# EAGLE board Panelized-CC2-BufferPack-V1R0-21-May-2019 (EAGLE 5.10)
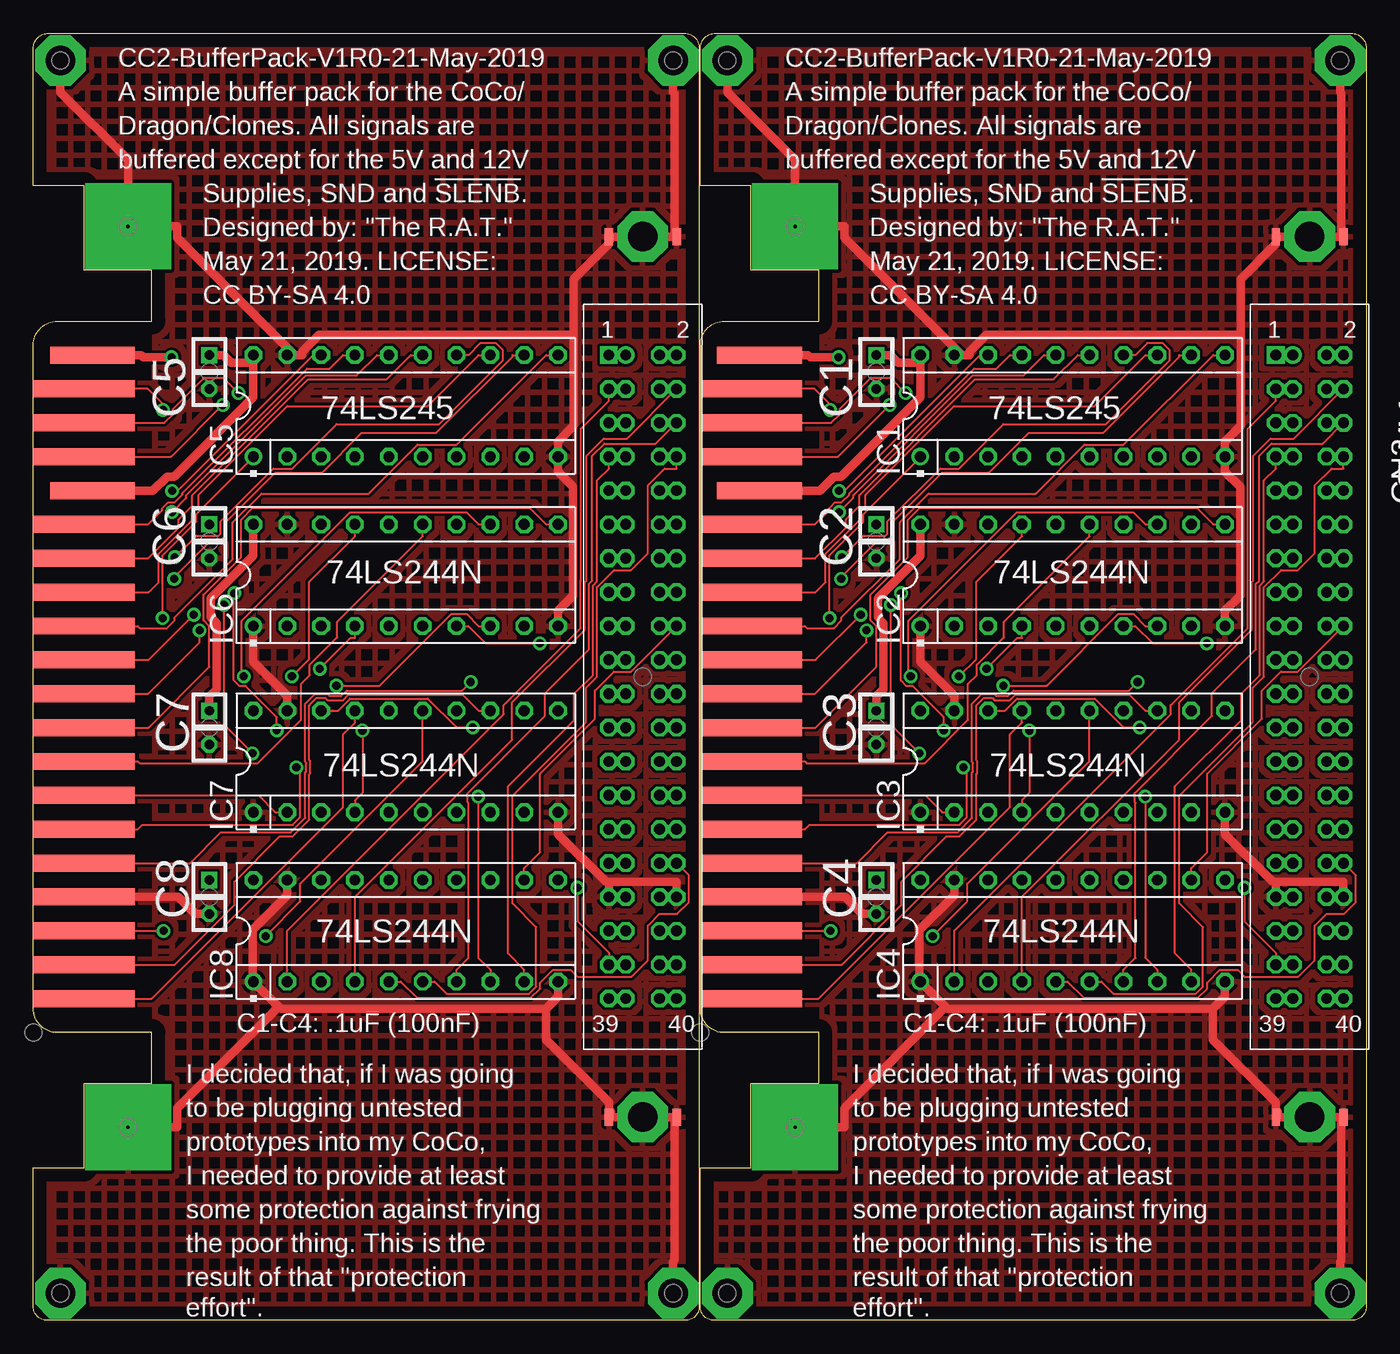
[diagram p0: board, top side]
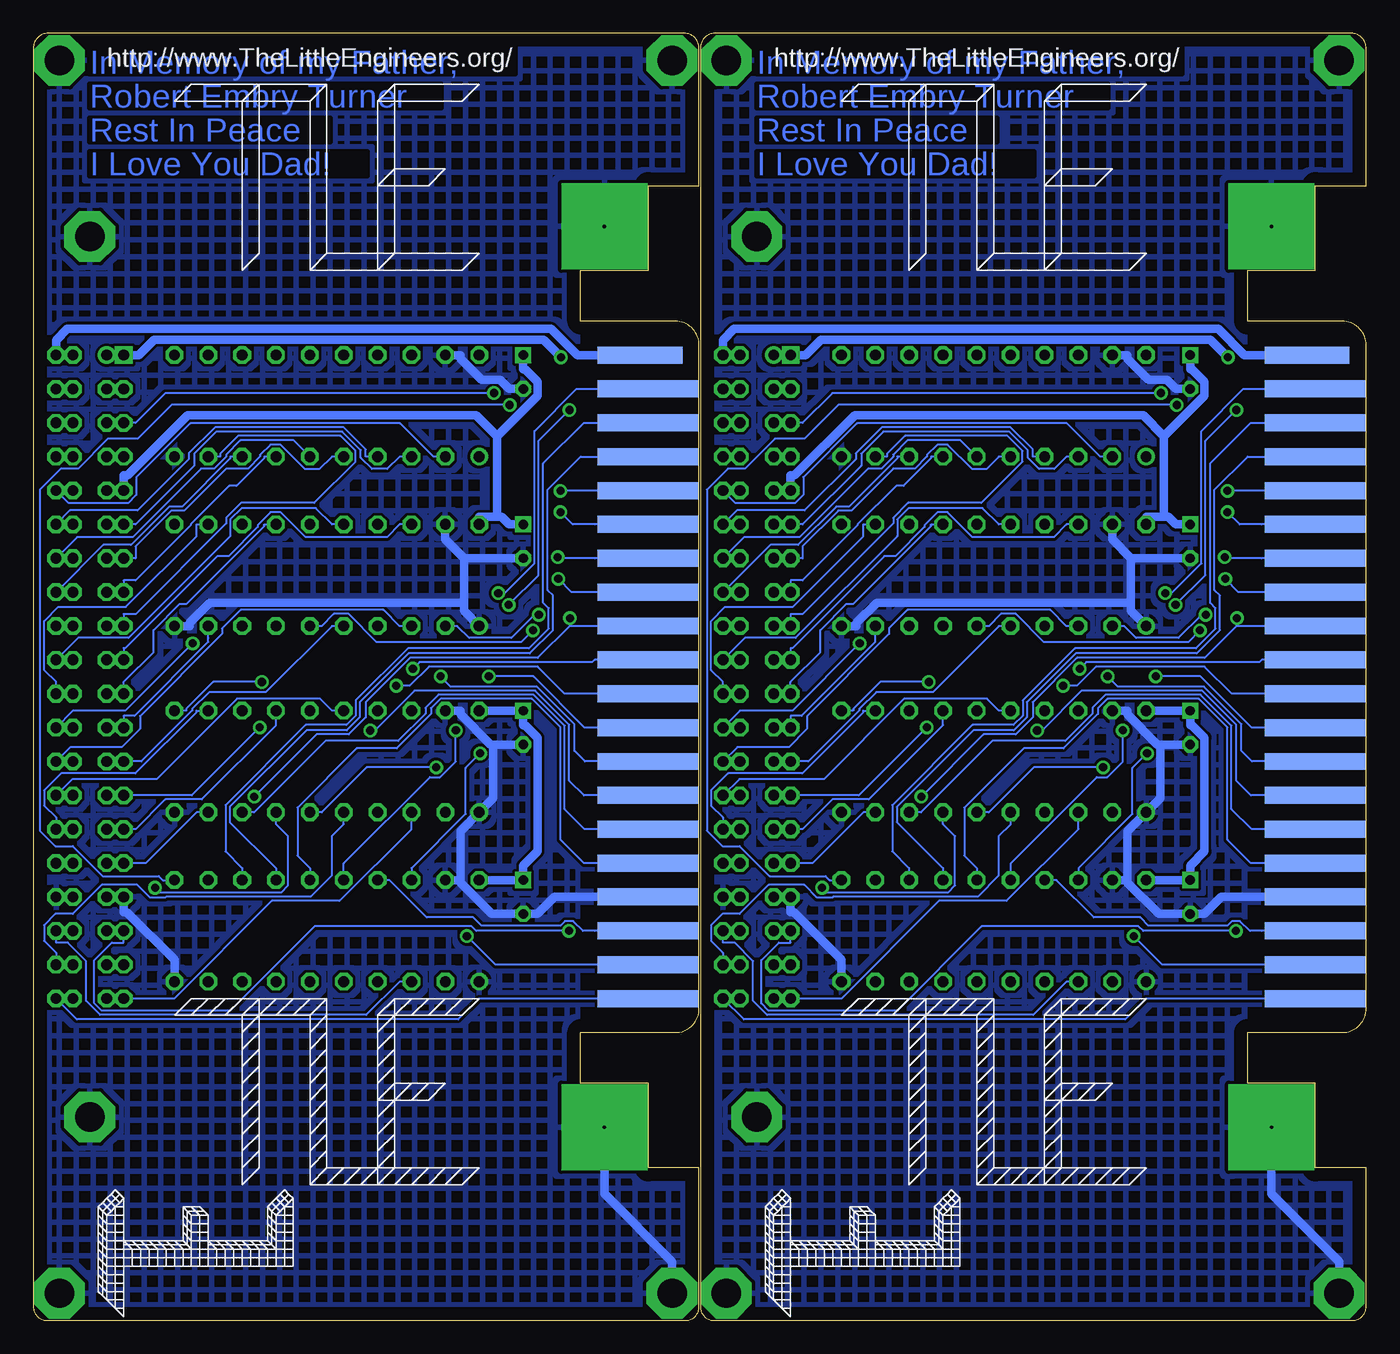
[diagram p1: board, bottom side, seen from below]

Size 100 x 96.52 mm. Coordinates in mm from the lower left corner, seen from the top.
Outline: 58.93,21.59 51.83,21.59 arc-90 50.04,23.39 50.04,73.13 arc-90 51.83,74.93 58.93,74.93 58.93,78.74 53.85,78.74 53.85,85.09 50.04,85.09 50.04,95.39 arc-90 51.16,96.52 98.91,96.52 arc-90 100,95.43 100,1 arc-90 99,0 51.04,0 arc-90 50.04,1 50.04,11.43 53.85,11.43 53.85,17.78 58.93,17.78 58.93,21.59
Outline: 8.89,21.59 1.8,21.59 arc-90 0,23.39 0,73.13 arc-90 1.8,74.93 8.89,74.93 8.89,78.74 3.81,78.74 3.81,85.09 0,85.09 0,95.39 arc-90 1.13,96.52 48.87,96.52 arc-90 49.96,95.43 49.96,1 arc-90 48.96,0 1,0 arc-90 0,1 0,11.43 3.81,11.43 3.81,17.78 8.89,17.78 8.89,21.59
Copper layers (1*16): Top 0.035mm / dielectric 1.5mm / Bottom 0.035mm
Design rules "default": minimum track width 10mil, minimum drill 24mil, track to track 8mil, track to pad 8mil, pad to pad 8mil, via to via 8mil, smd to smd 8mil, copper to edge 40mil, drill to drill 8mil, minimum pad ring 10mil, minimum via ring 8mil, stop-mask expansion 4mil, vias tented up to drill 0mil, thermal gap 10mil
Net classes: 0 default: width 0.152 mm, clearance 0.152 mm; 1 power: width 0.635 mm, clearance 0.152 mm

## Footprints (pad centres in the part's own frame; a part is rotated, then mirrored left to right if it is on the bottom)
PTH1 = drill 0.7 square: + -1.27,0 | drill 0.7 octagon: - 1.27,0
EDGE-CARD-PLUG-2X20-100-MEDIUM = smd 6.35 x 1.27: 1 4.445,50.8; 9 4.445,40.64 | smd 6.35 x 1.27 bottom: 2 4.445,50.8 | smd 7.62 x 1.27: 3 3.81,48.26; 5 3.81,45.72; 7 3.81,43.18; 11 3.81,38.1; 13 3.81,35.56; 15 3.81,33.02; 17 3.81,30.48; 19 3.81,27.94; 21 3.81,25.4; 23 3.81,22.86; 25 3.81,20.32; 27 3.81,17.78; 29 3.81,15.24; 31 3.81,12.7; 33 3.81,10.16; 35 3.81,7.62; 37 3.81,5.08; 39 3.81,2.54 | smd 7.62 x 1.27 bottom: 4 3.81,48.26; 6 3.81,45.72; 8 3.81,43.18; 10 3.81,40.64; 12 3.81,38.1; 14 3.81,35.56; 16 3.81,33.02; 18 3.81,30.48; 20 3.81,27.94; 22 3.81,25.4; 24 3.81,22.86; 26 3.81,20.32; 28 3.81,17.78; 30 3.81,15.24; 32 3.81,12.7; 34 3.81,10.16; 36 3.81,7.62; 38 3.81,5.08; 40 3.81,2.54
HEADER/EDGE-CARD-RECEPTACLE-2X20-100-STRAIGHT-W/EARS = drill 0.813 square: 1 -24.13,-2.54 | drill 0.813 octagon: 2 -24.13,2.54; 3 -21.59,-2.54; 4 -21.59,2.54; 5 -19.05,-2.54; 6 -19.05,2.54; 7 -16.51,-2.54; 8 -16.51,2.54; 9 -13.97,-2.54; 10 -13.97,2.54; 11 -11.43,-2.54; 12 -11.43,2.54; 13 -8.89,-2.54; 14 -8.89,2.54; 15 -6.35,-2.54; 16 -6.35,2.54; 17 -3.81,-2.54; 18 -3.81,2.54; 19 -1.27,-2.54; 20 -1.27,2.54; 21 1.27,-2.54; 22 1.27,2.54; 23 3.81,-2.54; 24 3.81,2.54; 25 6.35,-2.54; 26 6.35,2.54; 27 8.89,-2.54; 28 8.89,2.54; 29 11.43,-2.54; 30 11.43,2.54; 31 13.97,-2.54; 32 13.97,2.54; 33 16.51,-2.54; 34 16.51,2.54; 35 19.05,-2.54; 36 19.05,2.54; 37 21.59,-2.54; 38 21.59,2.54; 39 24.13,-2.54; 40 24.13,2.54; 42 -24.13,1.27; 43 -21.59,-1.27; 44 -21.59,1.27; 45 -19.05,-1.27; 46 -19.05,1.27; 47 -16.51,-1.27; 48 -16.51,1.27; 49 -13.97,-1.27; 50 -13.97,1.27; 51 -11.43,-1.27; 52 -11.43,1.27; 53 -8.89,-1.27; 54 -8.89,1.27; 55 -6.35,-1.27; 56 -6.35,1.27; 57 -3.81,-1.27; 58 -3.81,1.27; 59 -1.27,-1.27; 60 -1.27,1.27; 61 1.27,-1.27; 62 1.27,1.27; 63 3.81,-1.27; 64 3.81,1.27; 65 6.35,-1.27; 66 6.35,1.27; 67 8.89,-1.27; 68 8.89,1.27; 69 11.43,-1.27; 70 11.43,1.27; 71 13.97,-1.27; 72 13.97,1.27; 73 16.51,-1.27; 74 16.51,1.27; 75 19.05,-1.27; 76 19.05,1.27; 77 21.59,-1.27; 78 21.59,1.27; 79 24.13,-1.27; 80 24.13,1.27 | drill 0.813 round: 41 -24.13,-1.27 | drill 2.2 pad 3.81 octagon: 81 -33.02,0; 84 33.02,0 | smd 1.27 x 0.635: 82 -33.02,2.54; 83 -33.02,-2.54; 85 33.02,2.54; 86 33.02,-2.54
SQUARE = drill 0.254 pad 6.452 square: GND 0,0
STAND-OFF = drill 2.2 pad 3.81 octagon: GND 0,0
DIL20-3-TOP = drill 0.813 round: 1 -11.43,-3.81 | drill 0.813 octagon: 2 -8.89,-3.81; 3 -6.35,-3.81; 4 -3.81,-3.81; 5 -1.27,-3.81; 6 1.27,-3.81; 7 3.81,-3.81; 8 6.35,-3.81; 9 8.89,-3.81; 10 11.43,-3.81; 11 11.43,3.81; 12 8.89,3.81; 13 6.35,3.81; 14 3.81,3.81; 15 1.27,3.81; 16 -1.27,3.81; 17 -3.81,3.81; 18 -6.35,3.81; 19 -8.89,3.81; 20 -11.43,3.81

## Placement (x,y rotation side)
C1  [PTH1]  63.25,71.12 270 top
C2  [PTH1]  63.25,58.42 270 top
C3  [PTH1]  63.25,44.45 270 top
C4  [PTH1]  63.25,31.75 270 top
C5  [PTH1]  13.21,71.12 270 top
C6  [PTH1]  13.21,58.42 270 top
C7  [PTH1]  13.21,44.45 270 top
C8  [PTH1]  13.21,31.75 270 top
CN1  [EDGE-CARD-PLUG-2X20-100-MEDIUM]  50.04,21.59 0 top
CN2  [HEADER/EDGE-CARD-RECEPTACLE-2X20-100-STRAIGHT-W/EARS]  95.76,48.26 270 top
CN3  [EDGE-CARD-PLUG-2X20-100-MEDIUM]  0,21.59 0 top
CN4  [HEADER/EDGE-CARD-RECEPTACLE-2X20-100-STRAIGHT-W/EARS]  45.72,48.26 270 top
GND1  GROUNDING-SQUARE  [SQUARE]  57.15,82.04 0 top
GND2  GROUNDING-SQUARE  [SQUARE]  57.15,14.48 0 top
GND3  GROUNDING-STAND-OFF  [STAND-OFF]  52.07,94.49 0 top
GND4  GROUNDING-STAND-OFF  [STAND-OFF]  98.04,94.49 0 top
GND5  GROUNDING-STAND-OFF  [STAND-OFF]  98.04,2.03 0 top
GND6  GROUNDING-STAND-OFF  [STAND-OFF]  52.07,2.03 0 top
GND7  GROUNDING-SQUARE  [SQUARE]  7.11,82.04 0 top
GND8  GROUNDING-SQUARE  [SQUARE]  7.11,14.48 0 top
GND9  GROUNDING-STAND-OFF  [STAND-OFF]  2.03,94.49 0 top
GND10  GROUNDING-STAND-OFF  [STAND-OFF]  48.01,94.49 0 top
GND11  GROUNDING-STAND-OFF  [STAND-OFF]  48.01,2.03 0 top
GND12  GROUNDING-STAND-OFF  [STAND-OFF]  2.03,2.03 0 top
IC1  [DIL20-3-TOP]  77.98,68.58 0 top
IC2  74LS244N  [DIL20-3-TOP]  77.98,55.88 0 top
IC3  74LS244N  [DIL20-3-TOP]  77.98,41.91 0 top
IC4  74LS244N  [DIL20-3-TOP]  77.98,29.21 0 top
IC5  [DIL20-3-TOP]  27.94,68.58 0 top
IC6  74LS244N  [DIL20-3-TOP]  27.94,55.88 0 top
IC7  74LS244N  [DIL20-3-TOP]  27.94,41.91 0 top
IC8  74LS244N  [DIL20-3-TOP]  27.94,29.21 0 top
U$1  [TLE-LOGO-3]  79.25,83.82 0 bottom
U$2  [TLE-LOGO-4]  84.33,10.16 0 bottom
U$3  [TLE-LOGO-10]  80.52,0.25 90 bottom
U$4  [TLE-LOGO-3]  29.21,83.82 0 bottom
U$5  [TLE-LOGO-4]  34.29,10.16 0 bottom
U$6  [TLE-LOGO-10]  30.48,0.25 90 bottom

## Library data of the parts
C1-C8 CN1-CN4 GND1-GND12 IC1-IC8 = CC2-BufferPack-V1R0-21-May-2019
U$1-U$6 = TLE_LOGOS

## Nets
!BCART: CN2.8 IC4.6
!BCART1: CN4.8 IC8.6
!BCTS: CN2.32 IC4.5
!BCTS1: CN4.32 IC8.5
!BHALT: CN2.3 IC4.2
!BHALT1: CN4.3 IC8.2
!BNMI: CN2.4 IC4.4
!BNMI1: CN4.4 IC8.4
!BSCS: CN2.36 IC4.3
!BSCS1: CN4.36 IC8.3
!CART: CN1.8 IC4.14
!CART1: CN3.8 IC8.14
!CTS: CN1.32 IC4.15
!CTS1: CN3.32 IC8.15
!HALT: CN1.3 IC4.18
!HALT1: CN3.3 IC8.18
!NMI: CN1.4 IC4.16
!NMI1: CN3.4 IC8.16
!RESET: CN1.5 CN2.5
!RESET1: CN3.5 CN4.5
!SCS: CN1.36 IC4.17
!SCS1: CN3.36 IC8.17
!SLENB: CN1.40 CN2.40
!SLENB1: CN3.40 CN4.40
+12V [power]: CN1.2 CN2.2
+12V1 [power]: CN3.2 CN4.2
-12V [power]: CN1.1 CN2.1
-12V1 [power]: CN3.1 CN4.1
A0: CN1.19 IC2.2
A1: CN1.20 IC2.4
A2: CN1.21 IC2.6
A3: CN1.22 IC2.8
A4: CN1.23 IC2.11
A5: CN1.24 IC2.13
A6: CN1.25 IC2.15
A7: CN1.26 IC2.17
A8: CN1.27 IC3.2
A9: CN1.28 IC3.4
A10: CN1.29 IC3.6
A11: CN1.30 IC3.8
A12: CN1.31 IC3.11
A13: CN1.37 IC3.13
A14: CN1.38 IC3.15
A15: CN1.39 IC3.17
A16: CN3.19 IC6.2
A17: CN3.20 IC6.4
A18: CN3.21 IC6.6
A19: CN3.22 IC6.8
A20: CN3.23 IC6.11
A21: CN3.24 IC6.13
A22: CN3.25 IC6.15
A23: CN3.26 IC6.17
A24: CN3.27 IC7.2
A25: CN3.28 IC7.4
A26: CN3.29 IC7.6
A27: CN3.30 IC7.8
A28: CN3.31 IC7.11
A29: CN3.37 IC7.13
A30: CN3.38 IC7.15
A31: CN3.39 IC7.17
BA0: CN2.19 IC2.18
BA1: CN2.20 IC2.16
BA2: CN2.21 IC2.14
BA3: CN2.22 IC2.12
BA4: CN2.23 IC2.9
BA5: CN2.24 IC2.7
BA6: CN2.25 IC2.5
BA7: CN2.26 IC2.3
BA8: CN2.27 IC3.18
BA9: CN2.28 IC3.16
BA10: CN2.29 IC3.14
BA11: CN2.30 IC3.12
BA12: CN2.31 IC3.9
BA13: CN2.37 IC3.7
BA14: CN2.38 IC3.5
BA15: CN2.39 IC3.3
BA16: CN4.19 IC6.18
BA17: CN4.20 IC6.16
BA18: CN4.21 IC6.14
BA19: CN4.22 IC6.12
BA20: CN4.23 IC6.9
BA21: CN4.24 IC6.7
BA22: CN4.25 IC6.5
BA23: CN4.26 IC6.3
BA24: CN4.27 IC7.18
BA25: CN4.28 IC7.16
BA26: CN4.29 IC7.14
BA27: CN4.30 IC7.12
BA28: CN4.31 IC7.9
BA29: CN4.37 IC7.7
BA30: CN4.38 IC7.5
BA31: CN4.39 IC7.3
BD0: CN2.10 IC1.2
BD1: CN2.11 IC1.3
BD2: CN2.12 IC1.4
BD3: CN2.13 IC1.5
BD4: CN2.14 IC1.6
BD5: CN2.15 IC1.7
BD6: CN2.16 IC1.8
BD7: CN2.17 IC1.9
BD8: CN4.10 IC5.2
BD9: CN4.11 IC5.3
BD10: CN4.12 IC5.4
BD11: CN4.13 IC5.5
BD12: CN4.14 IC5.6
BD13: CN4.15 IC5.7
BD14: CN4.16 IC5.8
BD15: CN4.17 IC5.9
BE: CN2.6 IC4.7
BE1: CN4.6 IC8.7
BQ: CN2.7 IC4.9
BQ1: CN4.7 IC8.9
BR/!W: CN2.18 IC4.12
BR/!W1: CN4.18 IC8.12
D0: CN1.10 IC1.18
D1: CN1.11 IC1.17
D2: CN1.12 IC1.16
D3: CN1.13 IC1.15
D4: CN1.14 IC1.14
D5: CN1.15 IC1.13
D6: CN1.16 IC1.12
D7: CN1.17 IC1.11
D8: CN3.10 IC5.18
D9: CN3.11 IC5.17
D10: CN3.12 IC5.16
D11: CN3.13 IC5.15
D12: CN3.14 IC5.14
D13: CN3.15 IC5.13
D14: CN3.16 IC5.12
D15: CN3.17 IC5.11
E: CN1.6 IC4.13
E1: CN3.6 IC8.13
GND [power]: C1.- C2.- C3.- C4.- CN1.33 CN1.34 CN2.33 CN2.34 CN2.81 CN2.82 CN2.83 CN2.84 CN2.85 CN2.86 GND1.GND GND2.GND GND3.GND GND4.GND GND5.GND GND6.GND IC1.10 IC1.19 IC2.1 IC2.10 IC2.19 IC3.1 IC3.10 IC3.19 IC4.1 IC4.10 IC4.19
GND1 [power]: C5.- C6.- C7.- C8.- CN3.33 CN3.34 CN4.33 CN4.34 CN4.81 CN4.82 CN4.83 CN4.84 CN4.85 CN4.86 GND7.GND GND8.GND GND9.GND GND10.GND GND11.GND GND12.GND IC5.10 IC5.19 IC6.1 IC6.10 IC6.19 IC7.1 IC7.10 IC7.19 IC8.1 IC8.10 IC8.19
Q: CN1.7 IC4.11
Q1: CN3.7 IC8.11
R/!W: CN1.18 IC1.1 IC4.8
R/!W1: CN3.18 IC5.1 IC8.8
SND: CN1.35 CN2.35
SND1: CN3.35 CN4.35
VCC [power]: C1.+ C2.+ C3.+ C4.+ CN1.9 CN2.9 IC1.20 IC2.20 IC3.20 IC4.20
VCC1 [power]: C5.+ C6.+ C7.+ C8.+ CN3.9 CN4.9 IC5.20 IC6.20 IC7.20 IC8.20

## Tracks (layer width: path | path; a pad name or v marks a point on that pad's centre or on a via)
!BCART
  Top 0.152: CN2.8 98.3,63.88 97.41,63.88 96.14,62.61 96.14,57.53 94.87,56.26 93.61,56.26 92.33,54.98 92.33,48.26 91.49,47.42 91.49,44.86 85.98,39.35 85.98,31.27 87.76,29.49 87.76,25.03 87.23,24.51 81.03,24.51 80.14,25.4 IC4.6
!BCART1
  Top 0.152: CN4.8 48.26,63.88 47.37,63.88 46.1,62.61 46.1,57.53 44.83,56.26 43.57,56.26 42.29,54.98 42.29,48.26 41.45,47.42 41.45,44.86 35.94,39.35 35.94,31.27 37.72,29.49 37.72,25.03 37.19,24.51 30.99,24.51 30.1,25.4 IC8.6
!BCTS
  Top 0.152: CN2.32 99.22,33.36 99.22,31.37 98.34,30.48 97.03,30.48 96.14,29.59 96.14,27.02 94.9,25.78 90.86,25.78 90.35,26.29 89.03,26.29 88.06,25.32 88.06,24.88 87.36,24.18 78.82,24.18 77.6,25.4 IC4.5
!BCTS1
  Top 0.152: CN4.32 49.19,33.36 49.19,31.37 48.3,30.48 46.99,30.48 46.1,29.59 46.1,27.02 44.87,25.78 40.82,25.78 40.31,26.29 38.99,26.29 38.03,25.32 38.03,24.88 37.32,24.18 28.78,24.18 27.56,25.4 IC8.5
!BHALT
  Top 0.152: CN2.3 93.22,68.96 91.13,66.87 91.13,55.5 91.11,55.48 91.11,51.91 85.33,46.13 85.33,45.46 69.09,29.22 69.09,26.29 IC4.2
!BHALT1
  Top 0.152: CN4.3 43.18,68.96 41.09,66.87 41.09,55.5 41.07,55.48 41.07,51.91 35.29,46.13 35.29,45.46 19.05,29.22 19.05,26.29 IC8.2
!BNMI
  Top 0.152: CN2.4 94.58,66.13 92.82,66.13 91.53,64.83 91.53,55.47 91.41,55.36 91.41,51.79 85.96,46.33 85.96,43.56 74.17,31.76 74.17,26.29 IC4.4
!BNMI1
  Top 0.152: CN4.4 44.54,66.13 42.78,66.13 41.49,64.83 41.49,55.47 41.38,55.36 41.38,51.79 35.93,46.33 35.93,43.56 24.13,31.76 24.13,26.29 IC8.4
!BSCS
  Bottom 0.152: CN2.36 98.3,28.32 97.41,28.32 96.03,26.94 96.03,23.95 94.98,22.9 75.02,22.9 72.52,25.4 IC4.3
!BSCS1
  Bottom 0.152: CN4.36 48.26,28.32 47.37,28.32 45.99,26.94 45.99,23.95 44.94,22.9 24.98,22.9 22.48,25.4 IC8.3
!CART
  Bottom 0.152: CN1.8 58.93,64.77 61.41,62.29 61.41,54.76 61.02,54.37 61.02,51.77 62.76,50.03 71.83,50.03 75.5,46.36 75.5,45.23 76.48,44.25 79.51,44.25 85.25,38.51 85.25,37.37 81.79,33.91 IC4.14
!CART1
  Bottom 0.152: CN3.8 8.9,64.77 11.38,62.29 11.38,54.76 10.98,54.37 10.98,51.77 12.72,50.03 21.79,50.03 25.46,46.36 25.46,45.23 26.45,44.25 29.47,44.25 35.21,38.51 35.21,37.37 31.75,33.91 IC8.14
!CTS
  Bottom 0.152: CN1.32 58.69,34.29 60.45,36.05 60.45,44.47 62.59,46.61 69.45,46.61 70.16,45.91 70.16,45.47 72.74,42.89 75.73,42.89 80.18,38.45 80.18,34.84 79.25,33.91 IC4.15
!CTS1
  Bottom 0.152: CN3.32 8.65,34.29 10.41,36.05 10.41,44.47 12.56,46.61 19.41,46.61 20.12,45.91 20.12,45.47 22.7,42.89 25.7,42.89 30.14,38.45 30.14,34.84 29.21,33.91 IC8.15
!HALT  (via drill 0.61 pad 1.02)
  Top 0.152: v66.48,42.52 64.34,44.66 v64.34,53.65 | v59.78,68.27 59.78,68.69 58.62,69.85 CN1.3
  Bottom 0.152: v59.78,68.27 62.1,65.95 62.1,55.89 v64.34,53.65 | IC4.18 71.63,33.91 67.56,37.97 67.56,41.43 v66.48,42.52
!HALT1  (via drill 0.61 pad 1.02)
  Top 0.152: v16.44,42.52 14.3,44.66 v14.3,53.65 | v9.74,68.27 9.74,68.69 8.58,69.85 CN3.3
  Bottom 0.152: v9.74,68.27 12.06,65.95 12.06,55.89 v14.3,53.65 | IC8.18 21.59,33.91 17.53,37.97 17.53,41.43 v16.44,42.52
!NMI  (via drill 0.61 pad 1.02)
  Top 0.152: v68.3,44.24 68.3,45.24 65.99,47.56 65.52,47.56 65.08,47.99 65.08,54.5 v65.11,54.53
  Bottom 0.152: CN1.4 59.24,69.85 62.4,66.68 62.4,56.77 64.64,54.53 v65.11,54.53 | v68.3,44.24 68.3,41.9 69.47,40.74 70.25,40.74 76.71,34.28 IC4.16
!NMI1  (via drill 0.61 pad 1.02)
  Top 0.152: v18.26,44.24 18.26,45.24 15.95,47.56 15.48,47.56 15.04,47.99 15.04,54.5 v15.07,54.53
  Bottom 0.152: CN3.4 9.2,69.85 12.37,66.68 12.37,56.77 14.6,54.53 v15.07,54.53 | v18.26,44.24 18.26,41.9 19.43,40.74 20.21,40.74 26.67,34.28 IC8.16
!RESET  (via drill 0.61 pad 1.02)
  Top 0.152: CN1.5 59.86,67.31 60.51,67.96 60.51,68.35 62.86,70.7 64.29,70.7 v65.44,69.55
  Bottom 0.152: v65.44,69.55 90.09,69.55 92.33,67.31 CN2.5
!RESET1  (via drill 0.61 pad 1.02)
  Top 0.152: CN3.5 9.82,67.31 10.48,67.96 10.48,68.35 12.82,70.7 14.25,70.7 v15.4,69.55
  Bottom 0.152: v15.4,69.55 40.06,69.55 42.29,67.31 CN4.5
!SCS
  Bottom 0.152: 58.77,29.21 59.5,29.95 60.11,29.95 60.46,29.6 66.38,29.6 67,30.22 70.48,30.22 73.28,33.02 IC4.17 | 58.77,29.21 | 58.77,29.21 57.89,29.21 CN1.36
!SCS1
  Bottom 0.152: 8.73,29.21 9.46,29.95 10.07,29.95 10.42,29.6 16.34,29.6 16.96,30.22 20.44,30.22 23.24,33.02 IC8.17 | 8.73,29.21 | 8.73,29.21 7.85,29.21 CN3.36
!SLENB
  Bottom 0.152: CN2.40 96.73,22.57 68.12,22.57 66.56,24.13 CN1.40
!SLENB1
  Bottom 0.152: CN4.40 46.7,22.57 18.09,22.57 16.52,24.13 CN3.40
+12V
  Bottom 0.635: CN2.2 98.3,73.52 97.46,74.35 61.14,74.35 59.17,72.39 CN1.2
+12V1
  Bottom 0.635: CN4.2 48.26,73.52 47.43,74.35 11.1,74.35 9.13,72.39 CN3.2
-12V  (via drill 0.61 pad 1.02)
  Top 0.635: v60.41,72.23 58.29,72.23 58.13,72.39 CN1.1
  Bottom 0.635: v60.41,72.23 61.73,73.55 90.93,73.55 92.09,72.39 CN2.1
-12V1  (via drill 0.61 pad 1.02)
  Top 0.635: v10.37,72.23 8.25,72.23 8.09,72.39 CN3.1
  Bottom 0.635: v10.37,72.23 11.69,73.55 40.89,73.55 42.05,72.39 CN4.1
A0  (via drill 0.61 pad 1.02)
  Top 0.152: CN1.19 58.69,49.53 v62.08,52.92
  Bottom 0.152: v62.08,52.92 62.38,52.92 64.13,51.17 67.3,51.17 68.2,52.07 IC2.2
A1  (via drill 0.61 pad 1.02)
  Top 0.152: IC2.4 74.17,51.18 73.84,51.18 v71.52,48.86
  Bottom 0.152: CN1.20 57.89,49.53 58.06,49.35 71.03,49.35 v71.52,48.86
A2  (via drill 0.61 pad 1.02)
  Top 0.152: CN1.21 58.65,46.99 62.51,50.85 v62.51,51.75
  Bottom 0.152: v62.51,51.75 63.39,50.87 74.22,50.87 76.33,52.98 77.45,52.98 78.36,52.07 IC2.6
A3  (via drill 0.61 pad 1.02)
  Top 0.152: v72.77,47.59 76.03,47.59 81.41,52.97 82.54,52.97 83.44,52.07 IC2.8
  Bottom 0.152: CN1.22 60.12,46.99 62.16,49.03 70.31,49.03 71.75,47.59 v72.77,47.59
A4
  Top 0.152: CN1.23 58.69,44.45 63.25,49.01 63.25,52.05 62.81,52.48 62.81,54.42 65.61,57.22 65.61,60.03 66.51,60.93 87.28,60.93 88.52,59.69 IC2.11
A5  (via drill 0.61 pad 1.02)
  Top 0.152: v65.82,48.29 65.66,48.46 65.66,52.46 73.79,60.59 82.54,60.59 83.44,59.69 IC2.13
  Bottom 0.152: CN1.24 58.63,44.45 62.48,48.29 v65.82,48.29
A6
  Top 0.152: CN1.25 57.89,41.91 58.02,41.78 66.88,41.78 70.13,45.03 70.13,47.72 70.78,48.38 70.78,49.17 72.83,51.22 72.83,52.39 79.25,58.8 IC2.15
A7  (via drill 0.61 pad 1.02)
  Top 0.152: v69.44,48.29 70.74,49.59 70.74,55.37 74.17,58.8 IC2.17
  Bottom 0.152: CN1.26 58.62,41.91 59.41,42.7 59.41,44.72 62.22,47.53 68.68,47.53 v69.44,48.29
A8
  Top 0.152: CN1.27 57.89,39.37 66.93,39.37 68.2,38.1 IC3.2
A9  (via drill 0.61 pad 1.02)
  Top 0.152: IC3.4 74.17,38.99 74.73,39.55 v74.73,44.23
  Bottom 0.152: v74.73,44.23 74.38,44.23 71.39,47.22 62.34,47.22 59.79,44.67 59.79,40.48 58.69,39.37 CN1.28
A10  (via drill 0.61 pad 1.02)
  Top 0.152: CN1.29 57.89,36.83 58.22,37.16 69.5,37.16 70.04,37.71 70.04,41.21 v69.77,41.47
  Bottom 0.152: IC3.6 78.36,38.1 74.98,41.47 v69.77,41.47
A11
  Bottom 0.152: IC3.8 83.44,38.1 78.08,43.45 72.61,43.45 70.57,45.49 70.57,45.94 69.59,46.92 62.47,46.92 60.14,44.59 60.14,38.34 58.63,36.83 CN1.30
A12  (via drill 0.61 pad 1.02)
  Top 0.152: CN1.31 61.79,34.29 64.09,36.59 69.36,36.59 70.43,37.67 70.43,41.09 70.51,41.17 70.51,41.81 70.43,41.89 70.43,46.24 71.19,46.99 72.07,46.99 72.24,46.82 73.14,46.82 73.55,47.23 82.21,47.23 v82.85,47.87
  Bottom 0.152: v82.85,47.87 86.5,47.87 88.52,45.85 88.52,45.72 IC3.11
A13
  Top 0.152: CN1.37 60.65,26.67 65.14,31.15 65.14,32.9 68.52,36.29 69.48,36.29 70.74,37.55 70.74,40.97 70.81,41.04 70.81,41.94 70.74,42.01 70.74,46.11 71.31,46.69 71.94,46.69 72.11,46.52 73.27,46.52 73.67,46.92 82.24,46.92 83.44,45.72 IC3.13
A14  (via drill 0.61 pad 1.02)
  Top 0.152: IC3.15 79.25,41.92 70.07,32.74 70.07,31.41 v67.47,28.81
  Bottom 0.152: v67.47,28.81 65.33,26.67 CN1.38
A15
  Top 0.152: IC3.17 74.17,44.83 73.28,43.94 73.28,38.49 58.91,24.13 CN1.39
A16  (via drill 0.61 pad 1.02)
  Top 0.152: CN3.19 8.66,49.53 v12.04,52.92
  Bottom 0.152: v12.04,52.92 12.35,52.92 14.09,51.17 17.26,51.17 18.16,52.07 IC6.2
A17  (via drill 0.61 pad 1.02)
  Top 0.152: IC6.4 24.13,51.18 23.8,51.18 v21.48,48.86
  Bottom 0.152: CN3.20 7.85,49.53 8.03,49.35 20.99,49.35 v21.48,48.86
A18  (via drill 0.61 pad 1.02)
  Top 0.152: CN3.21 8.62,46.99 12.47,50.85 v12.47,51.75
  Bottom 0.152: v12.47,51.75 13.35,50.87 24.19,50.87 26.3,52.98 27.41,52.98 28.32,52.07 IC6.6
A19  (via drill 0.61 pad 1.02)
  Top 0.152: v22.73,47.59 25.99,47.59 31.37,52.97 32.5,52.97 33.4,52.07 IC6.8
  Bottom 0.152: CN3.22 10.09,46.99 12.13,49.03 20.27,49.03 21.71,47.59 v22.73,47.59
A20
  Top 0.152: CN3.23 8.65,44.45 13.21,49.01 13.21,52.05 12.78,52.48 12.78,54.42 15.57,57.22 15.57,60.03 16.47,60.93 37.25,60.93 38.48,59.69 IC6.11
A21  (via drill 0.61 pad 1.02)
  Top 0.152: v15.78,48.29 15.62,48.46 15.62,52.46 23.75,60.59 32.5,60.59 33.4,59.69 IC6.13
  Bottom 0.152: CN3.24 8.59,44.45 12.44,48.29 v15.78,48.29
A22
  Top 0.152: CN3.25 7.85,41.91 7.98,41.78 16.85,41.78 20.09,45.03 20.09,47.72 20.75,48.38 20.75,49.17 22.8,51.22 22.8,52.39 29.21,58.8 IC6.15
A23  (via drill 0.61 pad 1.02)
  Top 0.152: v19.4,48.29 20.7,49.59 20.7,55.37 24.13,58.8 IC6.17
  Bottom 0.152: CN3.26 8.58,41.91 9.37,42.7 9.37,44.72 12.18,47.53 18.64,47.53 v19.4,48.29
A24
  Top 0.152: CN3.27 7.85,39.37 16.89,39.37 18.16,38.1 IC7.2
A25  (via drill 0.61 pad 1.02)
  Top 0.152: IC7.4 24.13,38.99 24.69,39.55 v24.69,44.23
  Bottom 0.152: v24.69,44.23 24.35,44.23 21.36,47.22 12.3,47.22 9.75,44.67 9.75,40.48 8.65,39.37 CN3.28
A26  (via drill 0.61 pad 1.02)
  Top 0.152: CN3.29 7.85,36.83 8.18,37.16 19.46,37.16 20,37.71 20,41.21 v19.73,41.47
  Bottom 0.152: IC7.6 28.32,38.1 24.95,41.47 v19.73,41.47
A27
  Bottom 0.152: IC7.8 33.4,38.1 28.05,43.45 22.57,43.45 20.54,45.49 20.54,45.94 19.56,46.92 12.43,46.92 10.1,44.59 10.1,38.34 8.59,36.83 CN3.30
A28  (via drill 0.61 pad 1.02)
  Top 0.152: CN3.31 11.75,34.29 14.06,36.59 19.32,36.59 20.4,37.67 20.4,41.09 20.47,41.17 20.47,41.81 20.4,41.89 20.4,46.24 21.15,46.99 22.03,46.99 22.2,46.82 23.1,46.82 23.51,47.23 32.17,47.23 v32.81,47.87
  Bottom 0.152: v32.81,47.87 36.46,47.87 38.48,45.85 38.48,45.72 IC7.11
A29
  Top 0.152: CN3.37 10.62,26.67 15.1,31.15 15.1,32.9 18.48,36.29 19.44,36.29 20.7,37.55 20.7,40.97 20.78,41.04 20.78,41.94 20.7,42.01 20.7,46.11 21.27,46.69 21.9,46.69 22.07,46.52 23.23,46.52 23.63,46.92 32.2,46.92 33.4,45.72 IC7.13
A30  (via drill 0.61 pad 1.02)
  Top 0.152: IC7.15 29.21,41.92 20.03,32.74 20.03,31.41 v17.43,28.81
  Bottom 0.152: v17.43,28.81 15.29,26.67 CN3.38
A31
  Top 0.152: IC7.17 24.13,44.83 23.24,43.94 23.24,38.49 8.88,24.13 CN3.39
BA0
  Bottom 0.152: CN2.19 93.22,50.42 93.09,50.42 86.19,57.32 85.34,57.32 83.16,59.5 83.16,59.64 82.2,60.61 81.44,60.61 79.58,58.74 73.46,58.74 72.52,59.69 IC2.18
BA1
  Bottom 0.152: CN2.20 96.65,51.18 92.85,51.18 85.22,58.81 85.22,60.06 84.37,60.91 78.82,60.91 77.6,59.69 IC2.16
BA2
  Bottom 0.152: CN2.21 93.22,47.88 90.98,50.11 90.98,51.76 89.02,53.72 88.51,53.72 82.68,59.55 82.68,59.69 IC2.14
BA3
  Bottom 0.152: CN2.22 98.3,47.88 99.19,48.77 99.19,52.44 98.13,53.5 93.06,53.5 87.76,58.8 87.76,59.69 IC2.12
BA4
  Bottom 0.152: CN2.23 93.22,45.34 92.4,45.34 86.87,50.87 86.87,51.18 IC2.9
BA5  (via drill 0.61 pad 1.02)
  Top 0.152: v88.04,50.77 83.98,50.77 82.68,52.07 IC2.7
  Bottom 0.152: v88.04,50.77 93.09,45.72 97.03,45.72 CN2.24
BA6
  Bottom 0.152: CN2.25 91.89,41.91 88.06,45.73 88.06,45.85 86.8,47.11 82.56,47.11 77.6,52.07 IC2.5
BA7
  Bottom 0.152: CN2.26 97.22,42.99 93.36,42.99 91.99,44.37 91.99,45.32 85.84,51.47 85.84,51.89 84.44,53.28 73.73,53.28 72.52,52.07 IC2.3
BA8  (via drill 0.61 pad 1.02)
  Top 0.152: v83,44.47 81.78,44.47 79.63,46.62 73.8,46.62 72.9,45.72 72.52,45.72 IC3.18
  Bottom 0.152: CN2.27 88.1,39.37 v83,44.47
BA9
  Bottom 0.152: IC3.16 77.6,45.72 78.49,46.62 84.72,46.62 90.73,40.59 97.07,40.59 CN2.28
BA10
  Bottom 0.152: CN2.29 92.33,36.83 90.09,39.07 87.36,39.07 81.79,44.63 IC3.14
BA11
  Bottom 0.152: CN2.30 98.3,37.72 99.19,38.61 99.19,39.75 97.91,41.02 92.34,41.02 87.76,45.61 87.76,45.72 IC3.12
BA12
  Bottom 0.152: IC3.9 87.76,38.1 91.57,34.29 CN2.31
BA13  (via drill 0.61 pad 1.02)
  Top 0.152: v90.86,32.44 90.86,29.92 93.22,27.56 CN2.37 | v90.86,32.44
  Bottom 0.152: v90.86,32.44 90.5,32.08 81.42,32.08 80.89,32.61 80.89,36.32 81.79,37.21 IC3.7
BA14
  Bottom 0.152: CN2.38 98.3,27.56 99.19,28.45 99.19,29.63 98.34,30.48 97.04,30.48 94.86,32.66 92.19,32.66 91.23,31.69 90.1,31.69 90.01,31.78 79.19,31.78 77.6,33.37 77.6,36.32 76.71,37.21 IC3.5
BA15
  Bottom 0.152: IC3.3 71.63,36.84 77.02,31.45 82.1,31.45 89.42,24.13 CN2.39
BA16
  Bottom 0.152: CN4.19 43.18,50.42 43.05,50.42 36.15,57.32 35.31,57.32 33.12,59.5 33.12,59.64 32.16,60.61 31.41,60.61 29.55,58.74 23.43,58.74 22.48,59.69 IC6.18
BA17
  Bottom 0.152: CN4.20 46.61,51.18 42.81,51.18 35.18,58.81 35.18,60.06 34.33,60.91 28.78,60.91 27.56,59.69 IC6.16
BA18
  Bottom 0.152: CN4.21 43.18,47.88 40.95,50.11 40.95,51.76 38.98,53.72 38.47,53.72 32.64,59.55 32.64,59.69 IC6.14
BA19
  Bottom 0.152: CN4.22 48.26,47.88 49.15,48.77 49.15,52.44 48.09,53.5 43.02,53.5 37.72,58.8 37.72,59.69 IC6.12
BA20
  Bottom 0.152: CN4.23 43.18,45.34 42.36,45.34 36.83,50.87 36.83,51.18 IC6.9
BA21  (via drill 0.61 pad 1.02)
  Top 0.152: v38,50.77 33.94,50.77 32.64,52.07 IC6.7
  Bottom 0.152: v38,50.77 43.05,45.72 46.99,45.72 CN4.24
BA22
  Bottom 0.152: CN4.25 41.85,41.91 38.02,45.73 38.02,45.85 36.76,47.11 32.52,47.11 27.56,52.07 IC6.5
BA23
  Bottom 0.152: CN4.26 47.18,42.99 43.32,42.99 41.95,44.37 41.95,45.32 35.8,51.47 35.8,51.89 34.4,53.28 23.69,53.28 22.48,52.07 IC6.3
BA24  (via drill 0.61 pad 1.02)
  Top 0.152: v32.97,44.47 31.75,44.47 29.59,46.62 23.76,46.62 22.86,45.72 22.48,45.72 IC7.18
  Bottom 0.152: CN4.27 38.06,39.37 v32.97,44.47
BA25
  Bottom 0.152: IC7.16 27.56,45.72 28.45,46.62 34.68,46.62 40.7,40.59 47.03,40.59 CN4.28
BA26
  Bottom 0.152: CN4.29 42.29,36.83 40.06,39.07 37.32,39.07 31.75,44.63 IC7.14
BA27
  Bottom 0.152: CN4.30 48.26,37.72 49.15,38.61 49.15,39.75 47.88,41.02 42.31,41.02 37.72,45.61 37.72,45.72 IC7.12
BA28
  Bottom 0.152: IC7.9 37.72,38.1 41.53,34.29 CN4.31
BA29  (via drill 0.61 pad 1.02)
  Top 0.152: v40.82,32.44 40.82,29.92 43.18,27.56 CN4.37 | v40.82,32.44
  Bottom 0.152: v40.82,32.44 40.46,32.08 31.38,32.08 30.85,32.61 30.85,36.32 31.75,37.21 IC7.7
BA30
  Bottom 0.152: CN4.38 48.26,27.56 49.15,28.45 49.15,29.63 48.3,30.48 47,30.48 44.83,32.66 42.16,32.66 41.19,31.69 40.06,31.69 39.98,31.78 29.15,31.78 27.56,33.37 27.56,36.32 26.67,37.21 IC7.5
BA31
  Bottom 0.152: IC7.3 21.59,36.84 26.98,31.45 32.06,31.45 39.38,24.13 CN4.39
BD0
  Bottom 0.152: IC1.2 69.98,64.77 72.48,67.28 88.23,67.28 92.27,63.23 92.27,61.9 92.89,61.29 97.35,61.29 CN2.10
BD1
  Bottom 0.152: CN2.11 92.33,59.69 87.92,64.1 87.92,64.99 86.26,66.64 76.82,66.64 75.44,65.26 75.44,64.69 74.59,63.85 73.44,63.85 72.52,64.77 IC1.3
BD2
  Bottom 0.152: CN2.12 97.25,60.74 92.17,60.74 88.33,64.58 88.33,65.01 86.37,66.97 76.71,66.97 75.06,65.31 75.06,64.77 IC1.4
BD3
  Bottom 0.152: CN2.13 92.33,57.15 92.33,58.04 89.64,60.72 88.67,60.72 85.51,63.88 83.89,63.88 82.98,64.79 82.98,64.9 82.2,65.68 81.44,65.68 79.59,63.83 78.54,63.83 77.6,64.77 IC1.5
BD4
  Bottom 0.152: CN2.14 96.71,58.74 92.56,58.74 87.42,63.88 86.41,63.88 85.52,64.77 85.52,64.93 84.46,65.99 80.47,65.99 IC1.6
BD5
  Bottom 0.152: CN2.15 93.22,55.5 92.33,55.5 88.19,59.64 88.19,59.69 85.29,62.59 84.75,62.59 82.68,64.66 82.68,64.77 IC1.7
BD6
  Bottom 0.152: CN2.16 94.75,58.16 92.66,58.16 89.79,61.03 88.83,61.03 85.22,64.64 85.22,64.77 IC1.8
BD7
  Bottom 0.152: CN2.17 93.22,52.96 92.33,52.96 85.52,59.77 85.52,60.19 84.41,61.3 78.92,61.3 75.82,64.4 75.82,65.21 76.95,66.34 84.63,66.34 85.98,64.99 85.98,64.77 IC1.9
BD8
  Bottom 0.152: IC5.2 19.94,64.77 22.45,67.28 38.19,67.28 42.23,63.23 42.23,61.9 42.85,61.29 47.32,61.29 CN4.10
BD9
  Bottom 0.152: CN4.11 42.29,59.69 37.88,64.1 37.88,64.99 36.23,66.64 26.78,66.64 25.4,65.26 25.4,64.69 24.55,63.85 23.4,63.85 22.48,64.77 IC5.3
BD10
  Bottom 0.152: CN4.12 47.21,60.74 42.13,60.74 38.29,64.58 38.29,65.01 36.33,66.97 26.68,66.97 25.02,65.31 25.02,64.77 IC5.4
BD11
  Bottom 0.152: CN4.13 42.29,57.15 42.29,58.04 39.61,60.72 38.63,60.72 35.48,63.88 33.85,63.88 32.94,64.79 32.94,64.9 32.16,65.68 31.4,65.68 29.55,63.83 28.5,63.83 27.56,64.77 IC5.5
BD12
  Bottom 0.152: CN4.14 46.67,58.74 42.52,58.74 37.38,63.88 36.37,63.88 35.48,64.77 35.48,64.93 34.43,65.99 30.43,65.99 IC5.6
BD13
  Bottom 0.152: CN4.15 43.18,55.5 42.29,55.5 38.15,59.64 38.15,59.69 35.25,62.59 34.71,62.59 32.64,64.66 32.64,64.77 IC5.7
BD14
  Bottom 0.152: CN4.16 44.71,58.16 42.62,58.16 39.75,61.03 38.8,61.03 35.18,64.64 35.18,64.77 IC5.8
BD15
  Bottom 0.152: CN4.17 43.18,52.96 42.29,52.96 35.48,59.77 35.48,60.19 34.37,61.3 28.88,61.3 25.78,64.4 25.78,65.21 26.91,66.34 34.6,66.34 35.94,64.99 35.94,64.77 IC5.9
BE
  Top 0.152: CN2.6 96.74,65.75 92.88,65.75 91.97,64.84 91.97,55.48 91.72,55.23 91.72,50.31 88.43,47.02 88.43,45.33 82.63,39.53 82.63,38.86 82.69,38.81 82.69,27.19 81.79,26.29 IC4.7
BE1
  Top 0.152: CN4.6 46.7,65.75 42.84,65.75 41.93,64.84 41.93,55.48 41.68,55.23 41.68,50.31 38.39,47.02 38.39,45.33 32.59,39.53 32.59,38.86 32.65,38.81 32.65,27.19 31.75,26.29 IC8.7
BQ
  Top 0.152: CN2.7 93.22,63.88 92.33,62.99 92.33,55.41 92.02,55.11 92.02,48.39 90.61,46.98 90.61,45.02 85.65,40.05 85.65,27.51 86.87,26.29 IC4.9
BQ1
  Top 0.152: CN4.7 43.18,63.88 42.29,62.99 42.29,55.41 41.99,55.11 41.99,48.39 40.57,46.98 40.57,45.02 35.61,40.05 35.61,27.51 36.83,26.29 IC8.9
BR/!W
  Top 0.152: CN2.18 94.87,48.64 93.6,48.64 92.18,47.22 92.18,45.11 88.06,41 88.06,35.1 86.87,33.91 IC4.12
BR/!W1
  Top 0.152: CN4.18 44.83,48.64 43.56,48.64 42.14,47.22 42.14,45.11 38.02,41 38.02,35.1 36.83,33.91 IC8.12
D0  (via drill 0.61 pad 1.02)
  Top 0.152: IC1.18 71.04,72.39 60.85,62.21 v60.45,62.21
  Bottom 0.152: v60.45,62.21 60.43,62.23 57.89,62.23 CN1.10
D1
  Top 0.152: 72.26,71.38 73.28,72.39 IC1.17 | 72.26,71.38 | 72.26,71.38 70.57,71.38 61.21,62.02 61.21,61.93 60.63,61.34 60.14,61.34 59.71,60.91 59.71,60.76 58.64,59.69 CN1.11
D2  (via drill 0.61 pad 1.02)
  Top 0.152: v60.45,60.61 61.52,61.68 61.52,61.88 70.51,70.87 74.3,70.87 75.82,72.39 IC1.16
  Bottom 0.152: v60.45,60.61 59.53,59.69 57.89,59.69 CN1.12
D3
  Top 0.152: IC1.15 78.36,72.39 76.54,70.57 70.66,70.57 61.97,61.88 61.97,61.09 60.95,60.07 60.95,59.46 58.64,57.15 CN1.13
D4  (via drill 0.61 pad 1.02)
  Top 0.152: v60.66,57.23 62.28,58.86 63.95,58.86 64.08,58.99 64.08,59.92 68.04,63.88 69.46,63.88 72.78,67.2 80.47,67.2 85.27,72 85.27,72.75 84.74,73.28 83.57,73.28 82.68,72.39 IC1.14
  Bottom 0.152: v60.66,57.23 60.57,57.15 57.89,57.15 CN1.14
D5
  Top 0.152: CN1.15 58.68,54.61 59.44,55.36 59.44,57.48 61.97,60.02 61.97,60.58 62.43,61.04 62.43,61.91 69.08,68.56 79.61,68.56 83.44,72.39 IC1.13
D6  (via drill 0.61 pad 1.02)
  Top 0.152: v60.61,55.6 60.61,55.72 63.16,58.27 63.86,58.27 64.43,58.84 64.43,59.83 68.18,63.58 71.69,63.58 74.68,66.56 80.26,66.56 85.98,72.28 85.98,72.39 IC1.12
  Bottom 0.152: v60.61,55.6 59.61,54.61 57.89,54.61 CN1.16
D7
  Top 0.152: CN1.17 57.89,52.07 58.04,51.92 60.05,51.92 60.63,52.49 60.63,52.71 65,57.09 65,59.85 67.16,62 75.2,62 78.86,65.67 81.8,65.67 88.52,72.39 IC1.11
D8  (via drill 0.61 pad 1.02)
  Top 0.152: IC5.18 21,72.39 10.82,62.21 v10.41,62.21
  Bottom 0.152: v10.41,62.21 10.39,62.23 7.85,62.23 CN3.10
D9
  Top 0.152: 22.23,71.38 23.24,72.39 IC5.17 | 22.23,71.38 | 22.23,71.38 20.53,71.38 11.18,62.02 11.18,61.93 10.59,61.34 10.1,61.34 9.67,60.91 9.67,60.76 8.6,59.69 CN3.11
D10  (via drill 0.61 pad 1.02)
  Top 0.152: v10.41,60.61 11.48,61.68 11.48,61.88 20.47,70.87 24.26,70.87 25.78,72.39 IC5.16
  Bottom 0.152: v10.41,60.61 9.49,59.69 7.85,59.69 CN3.12
D11
  Top 0.152: IC5.15 28.32,72.39 26.5,70.57 20.62,70.57 11.93,61.88 11.93,61.09 10.91,60.07 10.91,59.46 8.6,57.15 CN3.13
D12  (via drill 0.61 pad 1.02)
  Top 0.152: v10.62,57.23 12.24,58.86 13.91,58.86 14.04,58.99 14.04,59.92 18,63.88 19.42,63.88 22.74,67.2 30.43,67.2 35.23,72 35.23,72.75 34.7,73.28 33.53,73.28 32.64,72.39 IC5.14
  Bottom 0.152: v10.62,57.23 10.53,57.15 7.85,57.15 CN3.14
D13
  Top 0.152: CN3.15 8.64,54.61 9.4,55.36 9.4,57.48 11.93,60.02 11.93,60.58 12.39,61.04 12.39,61.91 19.04,68.56 29.57,68.56 33.4,72.39 IC5.13
D14  (via drill 0.61 pad 1.02)
  Top 0.152: v10.57,55.6 10.57,55.72 13.12,58.27 13.82,58.27 14.39,58.84 14.39,59.83 18.14,63.58 21.65,63.58 24.64,66.56 30.22,66.56 35.94,72.28 35.94,72.39 IC5.12
  Bottom 0.152: v10.57,55.6 9.58,54.61 7.85,54.61 CN3.16
D15
  Top 0.152: CN3.17 7.85,52.07 8,51.92 10.02,51.92 10.59,52.49 10.59,52.71 14.96,57.09 14.96,59.85 17.12,62 25.16,62 28.82,65.67 31.76,65.67 38.48,72.39 IC5.11
E
  Bottom 0.152: CN1.6 58.69,67.31 61.74,64.26 61.74,53.81 61.34,53.42 61.34,51.87 62.81,50.4 71.89,50.4 75.81,46.48 75.81,45.36 76.5,44.66 79.56,44.66 85.59,38.64 85.59,35.17 84.33,33.91 IC4.13
E1
  Bottom 0.152: CN3.6 8.65,67.31 11.7,64.26 11.7,53.81 11.3,53.42 11.3,51.87 12.78,50.4 21.85,50.4 25.77,46.48 25.77,45.36 26.47,44.66 29.53,44.66 35.55,38.64 35.55,35.17 34.29,33.91 IC8.13
GND
  Top 0.635: 68.44,23.51 68.58,23.37 88.51,23.37 | 69.65,72.39 60.85,81.2 60.85,82.04 GND1.GND 57.15,87.03 52.07,92.11 GND3.GND | 69.65,72.39 70.22,72.39 70.22,72.62 71.49,73.9 90.58,73.9 | 69.65,72.39 IC1.19 | 90.58,73.9 90.58,67.07 89.41,65.9 IC1.10 89.41,63.64 90.54,62.51 90.54,54.33 89.41,53.2 IC2.10 | 90.58,73.9 90.58,78.09 93.22,80.73 93.22,81 | IC2.1 66.55,49.39 69.09,46.85 IC3.19 | IC3.10 89.41,36.47 92.99,32.88 93.22,32.88 | CN2.34 98.3,32.88 93.22,32.88 | CN2.33 93.22,32.88 | GND2.GND 60.85,14.48 60.85,15.92 68.44,23.51 | 68.44,23.51 IC4.1 66.49,25.45 66.49,29.29 69.09,31.89 IC4.19 | 88.51,23.37 89.41,24.27 IC4.10 | 88.51,23.37 88.51,21.05 93.22,16.34 93.22,15.79 | C4.- 62.17,30.48 60.9,31.75 CN1.34 | 93.22,15.79 93.38,15.63 93.38,15.24 CN2.84 96.94,15.24 98.13,15.24 | 93.22,15.79 CN2.86 | 93.22,81 93.38,81.17 93.38,81.28 CN2.81 98.13,81.28 | 93.22,81 CN2.83 | 98.13,81.28 CN2.82 | 98.13,81.28 98.13,92.02 98.04,92.11 GND4.GND | 98.13,15.24 CN2.85 | 98.13,15.24 98.13,4.5 98.04,4.41 GND5.GND
  Bottom 0.635: 67.68,53.83 67.68,57.15 | IC2.1 67.68,53.2 67.68,53.83 | 67.68,53.83 86.75,53.83 88.28,52.3 88.28,52.07 IC2.10 | 65.5,43.18 64.32,43.18 C3.- | 65.5,43.18 65.7,43.18 67.96,45.44 67.96,45.72 IC3.19 | 65.5,43.18 65.5,39.15 IC3.1 67.96,36.69 67.96,33.02 | 67.68,57.15 69.09,58.56 IC2.19 | 67.68,57.15 64.32,57.15 C2.- | GND6.GND 52.07,4.41 57.15,9.49 GND2.GND | C1.- 64.32,69.85 65,70.53 66.38,70.53 67.96,72.11 67.96,72.39 IC1.19 | 67.96,33.02 67.96,32.83 65.61,30.48 64.32,30.48 C4.- 62.17,30.48 60.9,31.75 CN1.34 | IC4.10 89.41,27.04 92.98,30.62 93.22,30.62 CN2.33 | IC4.19 67.96,33.02
  pour Bottom (hatched): 50.04,96.52 99.82,96.52 99.82,0.25 50.04,0.25
  pour Top (hatched): 50.04,96.52 100.08,96.52 100.08,0 50.04,0
GND1
  Top 0.635: 18.4,23.51 18.54,23.37 38.47,23.37 | 19.61,72.39 10.81,81.2 10.81,82.04 GND7.GND 7.11,87.03 2.03,92.11 GND9.GND | 19.61,72.39 20.18,72.39 20.18,72.62 21.45,73.9 40.54,73.9 | 19.61,72.39 IC5.19 | 40.54,73.9 40.54,67.07 39.37,65.9 IC5.10 39.37,63.64 40.5,62.51 40.5,54.33 39.37,53.2 IC6.10 | 40.54,73.9 40.54,78.09 43.18,80.73 43.18,81 | IC6.1 16.51,49.39 19.05,46.85 IC7.19 | IC7.10 39.37,36.47 42.95,32.88 43.18,32.88 | CN4.34 48.26,32.88 43.18,32.88 | CN4.33 43.18,32.88 | GND8.GND 10.81,14.48 10.81,15.92 18.4,23.51 | 18.4,23.51 IC8.1 16.45,25.45 16.45,29.29 19.05,31.89 IC8.19 | 38.47,23.37 39.37,24.27 IC8.10 | 38.47,23.37 38.47,21.05 43.18,16.34 43.18,15.79 | C8.- 12.13,30.48 10.86,31.75 CN3.34 | 43.18,15.79 43.34,15.63 43.34,15.24 CN4.84 46.91,15.24 48.09,15.24 | 43.18,15.79 CN4.86 | 43.18,81 43.34,81.17 43.34,81.28 CN4.81 48.09,81.28 | 43.18,81 CN4.83 | 48.09,81.28 CN4.82 | 48.09,81.28 48.09,92.02 48.01,92.11 GND10.GND | 48.09,15.24 CN4.85 | 48.09,15.24 48.09,4.5 48.01,4.41 GND11.GND
  Bottom 0.635: 17.64,53.83 17.64,57.15 | IC6.1 17.64,53.2 17.64,53.83 | 17.64,53.83 36.71,53.83 38.24,52.3 38.24,52.07 IC6.10 | 15.46,43.18 14.28,43.18 C7.- | 15.46,43.18 15.66,43.18 17.92,45.44 17.92,45.72 IC7.19 | 15.46,43.18 15.46,39.15 IC7.1 17.92,36.69 17.92,33.02 | 17.64,57.15 19.05,58.56 IC6.19 | 17.64,57.15 14.28,57.15 C6.- | GND12.GND 2.03,4.41 7.11,9.49 GND8.GND | C5.- 14.28,69.85 14.96,70.53 16.34,70.53 17.92,72.11 17.92,72.39 IC5.19 | 17.92,33.02 17.92,32.83 15.57,30.48 14.28,30.48 C8.- 12.13,30.48 10.86,31.75 CN3.34 | IC8.10 39.37,27.04 42.95,30.62 43.18,30.62 CN4.33 | IC8.19 17.92,33.02
  pour Bottom (hatched): 0,96.52 49.78,96.52 49.78,0.25 0,0.25
  pour Top (hatched): 0,96.52 50.04,96.52 50.04,0 0,0
Q  (via drill 0.61 pad 1.02)
  Top 0.152: v64.25,68.65 60.38,64.77 CN1.7
  Bottom 0.152: IC4.11 90.3,33.02 90.59,33.31 94.79,33.31 97.04,35.56 98.34,35.56 99.51,36.72 99.51,62.3 97.92,63.88 96.63,63.88 94.4,66.12 92.16,66.12 89.63,68.65 v64.25,68.65
Q1  (via drill 0.61 pad 1.02)
  Top 0.152: v14.22,68.65 10.34,64.77 CN3.7
  Bottom 0.152: IC8.11 40.26,33.02 40.55,33.31 44.75,33.31 47,35.56 48.31,35.56 49.47,36.72 49.47,62.3 47.89,63.88 46.6,63.88 44.36,66.12 42.13,66.12 39.59,68.65 v14.22,68.65
R/!W  (via drill 0.61 pad 1.02)
  Top 0.152: IC4.8 84.33,26.29 83.42,27.2 v83.42,39.28 | v59.74,52.65 59.74,57.36 62.27,59.89 62.27,60.45 66.55,64.73 IC1.1
  Bottom 0.152: v83.42,39.28 78.75,43.94 76.33,43.94 75.06,45.21 75.06,46.37 71.74,49.68 62.16,49.68 59.74,52.1 | 59.74,52.1 v59.74,52.65 | CN1.18 59.71,52.07 59.74,52.1
R/!W1  (via drill 0.61 pad 1.02)
  Top 0.152: IC8.8 34.29,26.29 33.38,27.2 v33.38,39.28 | v9.7,52.65 9.7,57.36 12.23,59.89 12.23,60.45 16.51,64.73 IC5.1
  Bottom 0.152: v33.38,39.28 28.72,43.94 26.29,43.94 25.02,45.21 25.02,46.37 21.7,49.68 12.12,49.68 9.7,52.1 | 9.7,52.1 v9.7,52.65 | CN3.18 9.67,52.07 9.7,52.1
SND  (via drill 0.61 pad 1.02)
  Top 0.152: CN1.35 57.89,29.21 v59.81,29.21
  Bottom 0.152: CN2.35 93.22,28.32 94.11,28.32 95.42,27.01 95.42,23.77 94.87,23.23 85.22,23.23 78.89,29.55 67.11,29.55 66.77,29.21 v59.81,29.21
SND1  (via drill 0.61 pad 1.02)
  Top 0.152: CN3.35 7.85,29.21 v9.77,29.21
  Bottom 0.152: CN4.35 43.18,28.32 44.07,28.32 45.38,27.01 45.38,23.77 44.84,23.23 35.18,23.23 28.86,29.55 17.08,29.55 16.73,29.21 v9.77,29.21
VCC
  Top 0.635: CN1.9 59.01,62.23 60.06,63.28 60.61,63.28 66.55,69.22 66.55,71.26 66.55,71.82 | C1.+ 64.32,72.39 64.89,71.82 66.55,71.82 | 66.55,71.82 IC1.20 | IC2.20 66.55,58.56 66.55,57.35 63.36,54.17 63.36,52.71 63.79,52.28 63.79,47.34 63.25,46.79 C3.+
  Bottom 0.635: 65.2,60.26 64.89,60.26 64.32,59.69 C2.+ | 65.2,60.26 66.55,60.26 IC2.20 | 65.2,60.26 65.2,66.29 | 65.2,66.29 | 65.2,66.29 66.77,67.86 88.41,67.86 92.92,63.36 93.22,63.36 CN2.9 | 65.2,66.29 62.17,69.32 62.17,70.38 63.11,71.32 63.25,71.32 C1.+ | IC3.20 64.32,45.72 C3.+ 63.25,44.65 63.11,44.65 62.17,43.71 62.17,35.17 63.25,34.09 C4.+ IC4.20
VCC1
  Top 0.635: CN3.9 8.97,62.23 10.02,63.28 10.57,63.28 16.51,69.22 16.51,71.26 16.51,71.82 | C5.+ 14.28,72.39 14.85,71.82 16.51,71.82 | 16.51,71.82 IC5.20 | IC6.20 16.51,58.56 16.51,57.35 13.32,54.17 13.32,52.71 13.75,52.28 13.75,47.34 13.21,46.79 C7.+
  Bottom 0.635: 15.16,60.26 14.85,60.26 14.28,59.69 C6.+ | 15.16,60.26 16.51,60.26 IC6.20 | 15.16,60.26 15.16,66.29 | 15.16,66.29 | 15.16,66.29 16.74,67.86 38.37,67.86 42.88,63.36 43.18,63.36 CN4.9 | 15.16,66.29 12.13,69.32 12.13,70.38 13.07,71.32 13.21,71.32 C5.+ | IC7.20 14.28,45.72 C7.+ 13.21,44.65 13.07,44.65 12.13,43.71 12.13,35.17 13.21,34.09 C8.+ IC8.20

## Text on the board
Bottom: In Memory of my Father, | In Memory of my Father, | Robert Embry Turner | Robert Embry Turner | Rest In Peace | Rest In Peace | I Love You Dad! | I Love You Dad!
tPlace: CC2-BufferPack-V1R0-21-May-2019 | CC2-BufferPack-V1R0-21-May-2019 | A simple buffer pack for the CoCo/ | A simple buffer pack for the CoCo/ | Dragon/Clones. All signals are | Dragon/Clones. All signals are | buffered except for the 5V and 12V | buffered except for the 5V and 12V | Supplies, SND and !SLENB!. | Supplies, SND and !SLENB!. | Designed by: "The R.A.T." | Designed by: "The R.A.T." | May 21, 2019. LICENSE: | May 21, 2019. LICENSE: | CC BY-SA 4.0 | CC BY-SA 4.0 | 74LS245 | 74LS245 | C1-C4: .1uF (100nF) | C1-C4: .1uF (100nF) | I decided that, if I was going | I decided that, if I was going | to be plugging untested | to be plugging untested | prototypes into my CoCo, | prototypes into my CoCo, | I needed to provide at least | I needed to provide at least | some protection against frying | some protection against frying | the poor thing. This is the | the poor thing. This is the | result of that "protection | result of that "protection | effort". | effort".
bPlace: http://www.TheLittleEngineers.org/ | http://www.TheLittleEngineers.org/